# EAGLE board LSM9DS0_Breakout_Board-panel5 (EAGLE 7.1.0), part 1 of 2
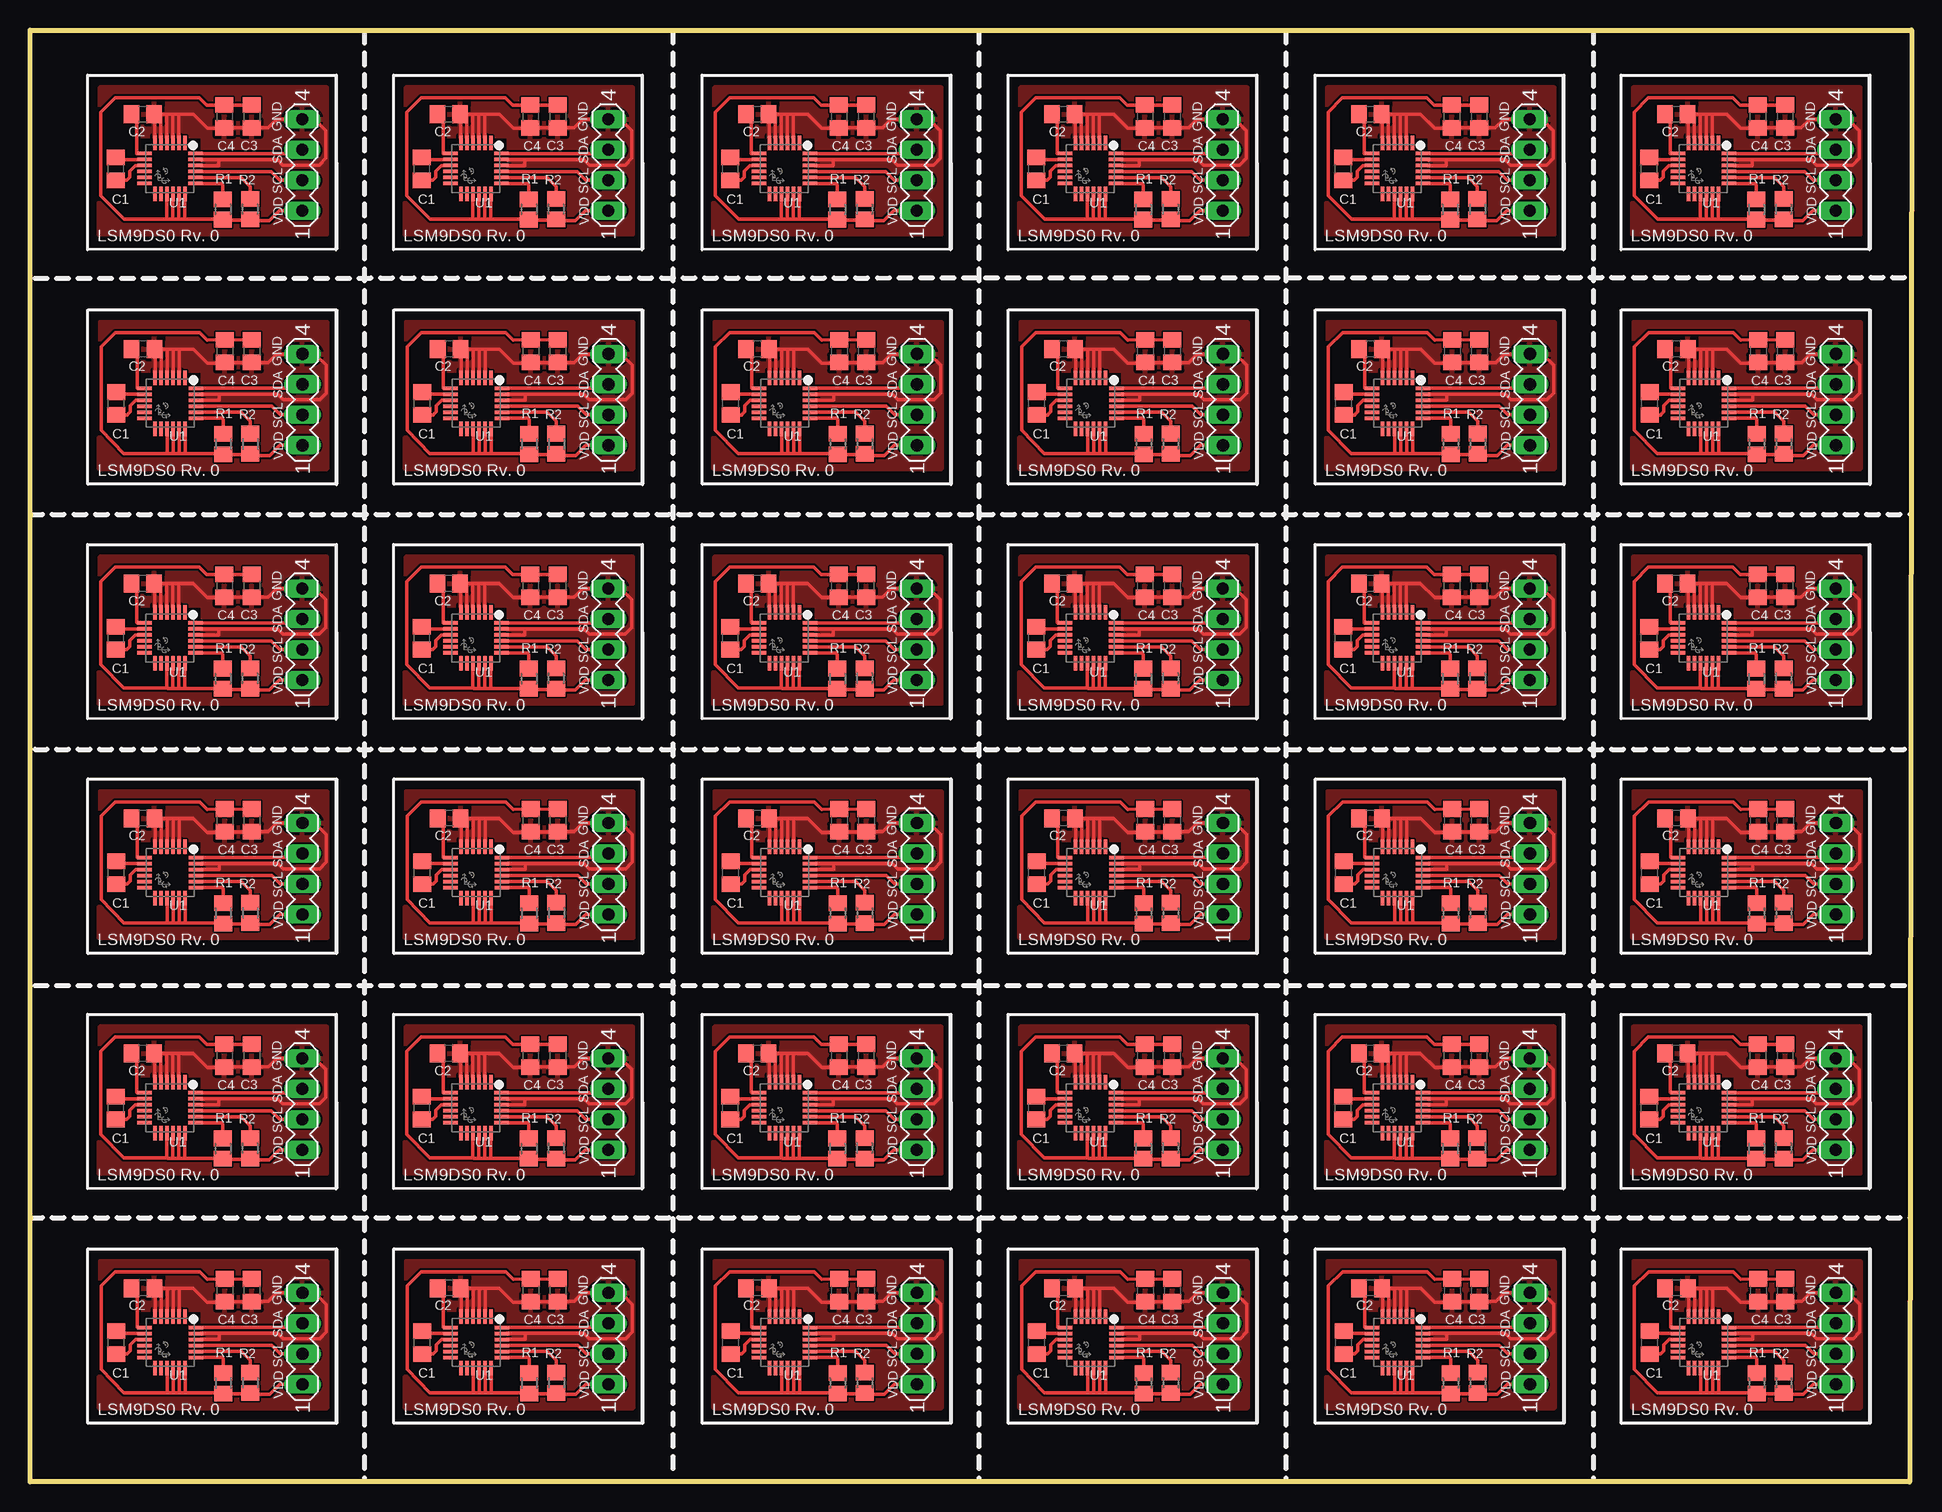
[diagram p0: board, top side]

Size 156.79 x 121.03 mm. Coordinates in mm from the lower left corner, seen from the top.
Outline: 0,121.03 156.79,121.03 156.64,0 0,0 0,121.03
Copper layers (1*16): Top 0.035559375mm / dielectric 1.501140625mm / Bottom 0.035559375mm
Design rules "4pcb-33board *": minimum track width 8mil, minimum drill 15mil, track to track 6mil, track to pad 6mil, pad to pad 6mil, via to via 6mil, smd to smd 6mil, copper to edge 10mil, drill to drill 10mil, minimum pad ring 10mil, minimum via ring 8mil, stop-mask expansion 4mil, vias tented up to drill 0mil, thermal gap 10mil
Net classes: 1 RFSIG: width 0.457 mm, clearance 0.205 mm to class 0, clearance 0.205 mm
bRestrict: area 10.2,10.1 to 13.2,13.1; area 10.2,29.6 to 13.1,32.7; area 10.2,49.2 to 13.2,52.3; area 10.2,68.8 to 13.1,71.9; area 10.2,88.3 to 13.2,91.4; area 10.2,107.9 to 13.1,111; area 35.7,10.1 to 38.7,13.1; area 35.7,29.6 to 38.6,32.7; area 35.7,49.2 to 38.7,52.3; area 35.7,68.8 to 38.6,71.9; area 35.7,88.3 to 38.7,91.4; area 35.7,107.9 to 38.6,111; 24 more areas

## Footprints (pad centres in the part's own frame; a part is rotated, then mirrored left to right if it is on the bottom)
C0805 = smd 1.3 x 1.5: 1 -0.95,0; 2 0.95,0
R0805 = smd 1.3 x 1.5: 1 -0.85,0; 2 0.85,0
MA04-1 = drill 1.016 long: 1 -3.81,0; 2 -1.27,0; 3 1.27,0; 4 3.81,0
LGA-24 = smd 1.208 x 0.29: 1 -2.129,1.25; 2 -2.129,0.75; 3 -2.129,0.25; 4 -2.129,-0.25; 5 -2.129,-0.75; 6 -2.129,-1.25; 13 2.129,-1.25; 14 2.129,-0.75; 15 2.129,-0.25; 16 2.129,0.25; 17 2.129,0.75; 18 2.129,1.25 | smd 0.29 x 1.208: 7 -1.25,-2.129; 8 -0.75,-2.129; 9 -0.25,-2.129; 10 0.25,-2.129; 11 0.75,-2.129; 12 1.25,-2.129; 19 1.25,2.129; 20 0.75,2.129; 21 0.25,2.129; 22 -0.25,2.129; 23 -0.75,2.129; 24 -1.25,2.129

## Placement (x,y rotation side)
C1  0.22uF  [C0805]  7.19,11.61 90 top
C2  4.7uF  [C0805]  9.42,16.15 180 top
C3  10uF  [C0805]  18.49,15.98 270 top
C4  100nF  [C0805]  16.23,15.98 270 top
C5  100nF  [C0805]  16.21,35.53 270 top
C6  10uF  [C0805]  18.47,35.53 270 top
C7  0.22uF  [C0805]  7.16,31.17 90 top
C8  4.7uF  [C0805]  9.4,35.71 180 top
C9  100nF  [C0805]  16.23,55.14 270 top
C10  10uF  [C0805]  18.49,55.14 270 top
C11  0.22uF  [C0805]  7.19,50.77 90 top
C12  4.7uF  [C0805]  9.42,55.32 180 top
C13  100nF  [C0805]  16.21,74.7 270 top
C14  10uF  [C0805]  18.47,74.7 270 top
C15  0.22uF  [C0805]  7.16,70.33 90 top
C16  4.7uF  [C0805]  9.4,74.88 180 top
C17  100nF  [C0805]  16.23,94.26 270 top
C18  10uF  [C0805]  18.49,94.26 270 top
C19  0.22uF  [C0805]  7.19,89.89 90 top
C20  4.7uF  [C0805]  9.42,94.44 180 top
C21  100nF  [C0805]  16.21,113.82 270 top
C22  10uF  [C0805]  18.47,113.82 270 top
C23  0.22uF  [C0805]  7.16,109.45 90 top
C24  4.7uF  [C0805]  9.4,114 180 top
C33  100nF  [C0805]  41.73,15.98 270 top
C34  10uF  [C0805]  43.99,15.98 270 top
C35  0.22uF  [C0805]  32.69,11.61 90 top
C36  4.7uF  [C0805]  34.92,16.15 180 top
C37  100nF  [C0805]  41.71,35.53 270 top
C38  10uF  [C0805]  43.97,35.53 270 top
C39  0.22uF  [C0805]  32.66,31.17 90 top
C40  4.7uF  [C0805]  34.9,35.71 180 top
C41  100nF  [C0805]  41.73,55.14 270 top
C42  10uF  [C0805]  43.99,55.14 270 top
C43  0.22uF  [C0805]  32.69,50.77 90 top
C44  4.7uF  [C0805]  34.92,55.32 180 top
C45  100nF  [C0805]  41.71,74.7 270 top
C46  10uF  [C0805]  43.97,74.7 270 top
C47  0.22uF  [C0805]  32.66,70.33 90 top
C48  4.7uF  [C0805]  34.9,74.88 180 top
C49  100nF  [C0805]  41.73,94.26 270 top
C50  10uF  [C0805]  43.99,94.26 270 top
C51  0.22uF  [C0805]  32.69,89.89 90 top
C52  4.7uF  [C0805]  34.92,94.44 180 top
C53  100nF  [C0805]  41.71,113.82 270 top
C54  10uF  [C0805]  43.97,113.82 270 top
C55  0.22uF  [C0805]  32.66,109.45 90 top
C56  4.7uF  [C0805]  34.9,114 180 top
C65  100nF  [C0805]  67.44,15.98 270 top
C66  10uF  [C0805]  69.7,15.98 270 top
C67  0.22uF  [C0805]  58.39,11.61 90 top
C68  4.7uF  [C0805]  60.63,16.15 180 top
C69  100nF  [C0805]  67.41,35.53 270 top
C70  10uF  [C0805]  69.67,35.53 270 top
C71  0.22uF  [C0805]  58.37,31.17 90 top
C72  4.7uF  [C0805]  60.6,35.71 180 top
C73  100nF  [C0805]  67.44,55.14 270 top
C74  10uF  [C0805]  69.7,55.14 270 top
C75  0.22uF  [C0805]  58.39,50.77 90 top
C76  4.7uF  [C0805]  60.63,55.32 180 top
C77  100nF  [C0805]  67.41,74.7 270 top
C78  10uF  [C0805]  69.67,74.7 270 top
C79  0.22uF  [C0805]  58.37,70.33 90 top
C80  4.7uF  [C0805]  60.6,74.88 180 top
C81  100nF  [C0805]  67.44,94.26 270 top
C82  10uF  [C0805]  69.7,94.26 270 top
C83  0.22uF  [C0805]  58.39,89.89 90 top
C84  4.7uF  [C0805]  60.63,94.44 180 top
C85  100nF  [C0805]  67.41,113.82 270 top
C86  10uF  [C0805]  69.67,113.82 270 top
C87  0.22uF  [C0805]  58.37,109.45 90 top
C88  4.7uF  [C0805]  60.6,114 180 top
C97  100nF  [C0805]  92.94,15.98 270 top
C98  10uF  [C0805]  95.2,15.98 270 top
C99  0.22uF  [C0805]  83.9,11.61 90 top
C100  4.7uF  [C0805]  86.13,16.15 180 top
C101  100nF  [C0805]  92.91,35.53 270 top
C102  10uF  [C0805]  95.17,35.53 270 top
C103  0.22uF  [C0805]  83.87,31.17 90 top
C104  4.7uF  [C0805]  86.11,35.71 180 top
C105  100nF  [C0805]  92.94,55.14 270 top
C106  10uF  [C0805]  95.2,55.14 270 top
C107  0.22uF  [C0805]  83.9,50.77 90 top
C108  4.7uF  [C0805]  86.13,55.32 180 top
C109  100nF  [C0805]  92.91,74.7 270 top
C110  10uF  [C0805]  95.17,74.7 270 top
C111  0.22uF  [C0805]  83.87,70.33 90 top
C112  4.7uF  [C0805]  86.11,74.88 180 top
C113  100nF  [C0805]  92.94,94.26 270 top
C114  10uF  [C0805]  95.2,94.26 270 top
C115  0.22uF  [C0805]  83.9,89.89 90 top
C116  4.7uF  [C0805]  86.13,94.44 180 top
C117  100nF  [C0805]  92.91,113.82 270 top
C118  10uF  [C0805]  95.17,113.82 270 top
C119  0.22uF  [C0805]  83.87,109.45 90 top
C120  4.7uF  [C0805]  86.11,114 180 top
C129  100nF  [C0805]  118.52,15.98 270 top
C130  10uF  [C0805]  120.78,15.98 270 top
C131  0.22uF  [C0805]  109.47,11.61 90 top
C132  4.7uF  [C0805]  111.71,16.15 180 top
C133  100nF  [C0805]  118.49,35.53 270 top
C134  10uF  [C0805]  120.75,35.53 270 top
C135  0.22uF  [C0805]  109.45,31.17 90 top
C136  4.7uF  [C0805]  111.68,35.71 180 top
C137  100nF  [C0805]  118.52,55.14 270 top
C138  10uF  [C0805]  120.78,55.14 270 top
C139  0.22uF  [C0805]  109.47,50.77 90 top
C140  4.7uF  [C0805]  111.71,55.32 180 top
C141  100nF  [C0805]  118.49,74.7 270 top
C142  10uF  [C0805]  120.75,74.7 270 top
C143  0.22uF  [C0805]  109.45,70.33 90 top
C144  4.7uF  [C0805]  111.68,74.88 180 top
C145  100nF  [C0805]  118.52,94.26 270 top
C146  10uF  [C0805]  120.78,94.26 270 top
C147  0.22uF  [C0805]  109.47,89.89 90 top
C148  4.7uF  [C0805]  111.71,94.44 180 top
C149  100nF  [C0805]  118.49,113.82 270 top
C150  10uF  [C0805]  120.75,113.82 270 top
C151  0.22uF  [C0805]  109.45,109.45 90 top
C152  4.7uF  [C0805]  111.68,114 180 top
C161  100nF  [C0805]  144.02,15.98 270 top
C162  10uF  [C0805]  146.28,15.98 270 top
C163  0.22uF  [C0805]  134.98,11.61 90 top
C164  4.7uF  [C0805]  137.21,16.15 180 top
C165  100nF  [C0805]  143.99,35.53 270 top
C166  10uF  [C0805]  146.25,35.53 270 top
C167  0.22uF  [C0805]  134.95,31.17 90 top
C168  4.7uF  [C0805]  137.19,35.71 180 top
C169  100nF  [C0805]  144.02,55.14 270 top
C170  10uF  [C0805]  146.28,55.14 270 top
C171  0.22uF  [C0805]  134.98,50.77 90 top
C172  4.7uF  [C0805]  137.21,55.32 180 top
C173  100nF  [C0805]  143.99,74.7 270 top
C174  10uF  [C0805]  146.25,74.7 270 top
C175  0.22uF  [C0805]  134.95,70.33 90 top
C176  4.7uF  [C0805]  137.19,74.88 180 top
C177  100nF  [C0805]  144.02,94.26 270 top
C178  10uF  [C0805]  146.28,94.26 270 top
C179  0.22uF  [C0805]  134.98,89.89 90 top
C180  4.7uF  [C0805]  137.21,94.44 180 top
C181  100nF  [C0805]  143.99,113.82 270 top
C182  10uF  [C0805]  146.25,113.82 270 top
C183  0.22uF  [C0805]  134.95,109.45 90 top
C184  4.7uF  [C0805]  137.19,114 180 top
R1  10k  [R0805]  16.1,8.23 270 top
R2  10k  [R0805]  18.36,8.25 270 top
R3  10k  [R0805]  16.08,27.79 270 top
R4  10k  [R0805]  18.34,27.81 270 top
R5  10k  [R0805]  16.1,47.4 270 top
R6  10k  [R0805]  18.36,47.42 270 top
R7  10k  [R0805]  16.08,66.95 270 top
R8  10k  [R0805]  18.34,66.98 270 top
R9  10k  [R0805]  16.1,86.51 270 top
R10  10k  [R0805]  18.36,86.54 270 top
R11  10k  [R0805]  16.08,106.07 270 top
R12  10k  [R0805]  18.34,106.1 270 top
R17  10k  [R0805]  41.61,8.23 270 top
R18  10k  [R0805]  43.87,8.25 270 top
R19  10k  [R0805]  41.58,27.79 270 top
R20  10k  [R0805]  43.84,27.81 270 top
R21  10k  [R0805]  41.61,47.4 270 top
R22  10k  [R0805]  43.87,47.42 270 top
R23  10k  [R0805]  41.58,66.95 270 top
R24  10k  [R0805]  43.84,66.98 270 top
R25  10k  [R0805]  41.61,86.51 270 top
R26  10k  [R0805]  43.87,86.54 270 top
R27  10k  [R0805]  41.58,106.07 270 top
R28  10k  [R0805]  43.84,106.1 270 top
R33  10k  [R0805]  67.31,8.23 270 top
R34  10k  [R0805]  69.57,8.25 270 top
R35  10k  [R0805]  67.28,27.79 270 top
R36  10k  [R0805]  69.55,27.81 270 top
R37  10k  [R0805]  67.31,47.4 270 top
R38  10k  [R0805]  69.57,47.42 270 top
R39  10k  [R0805]  67.28,66.95 270 top
R40  10k  [R0805]  69.55,66.98 270 top
R41  10k  [R0805]  67.31,86.51 270 top
R42  10k  [R0805]  69.57,86.54 270 top
R43  10k  [R0805]  67.28,106.07 270 top
R44  10k  [R0805]  69.55,106.1 270 top
R49  10k  [R0805]  92.81,8.23 270 top
R50  10k  [R0805]  95.07,8.25 270 top
R51  10k  [R0805]  92.79,27.79 270 top
R52  10k  [R0805]  95.05,27.81 270 top
R53  10k  [R0805]  92.81,47.4 270 top
R54  10k  [R0805]  95.07,47.42 270 top
R55  10k  [R0805]  92.79,66.95 270 top
R56  10k  [R0805]  95.05,66.98 270 top
R57  10k  [R0805]  92.81,86.51 270 top
R58  10k  [R0805]  95.07,86.54 270 top
R59  10k  [R0805]  92.79,106.07 270 top
R60  10k  [R0805]  95.05,106.1 270 top
R65  10k  [R0805]  118.39,8.23 270 top
R66  10k  [R0805]  120.65,8.25 270 top
R67  10k  [R0805]  118.36,27.79 270 top
R68  10k  [R0805]  120.62,27.81 270 top
R69  10k  [R0805]  118.39,47.4 270 top
R70  10k  [R0805]  120.65,47.42 270 top
R71  10k  [R0805]  118.36,66.95 270 top
R72  10k  [R0805]  120.62,66.98 270 top
R73  10k  [R0805]  118.39,86.51 270 top
R74  10k  [R0805]  120.65,86.54 270 top
R75  10k  [R0805]  118.36,106.07 270 top
R76  10k  [R0805]  120.62,106.1 270 top
R81  10k  [R0805]  143.89,8.23 270 top
R82  10k  [R0805]  146.15,8.25 270 top
R83  10k  [R0805]  143.87,27.79 270 top
R84  10k  [R0805]  146.13,27.81 270 top
R85  10k  [R0805]  143.89,47.4 270 top
R86  10k  [R0805]  146.15,47.42 270 top
R87  10k  [R0805]  143.87,66.95 270 top
R88  10k  [R0805]  146.13,66.98 270 top
R89  10k  [R0805]  143.89,86.51 270 top
R90  10k  [R0805]  146.15,86.54 270 top
R91  10k  [R0805]  143.87,106.07 270 top
R92  10k  [R0805]  146.13,106.1 270 top
SV1  JP1  [MA04-1]  22.71,11.94 90 top
SV2  JP1  [MA04-1]  22.68,31.5 90 top
SV3  JP1  [MA04-1]  22.71,51.1 90 top
SV4  JP1  [MA04-1]  22.68,70.66 90 top
SV5  JP1  [MA04-1]  22.71,90.22 90 top
SV6  JP1  [MA04-1]  22.68,109.78 90 top
SV9  JP1  [MA04-1]  48.21,11.94 90 top
SV10  JP1  [MA04-1]  48.18,31.5 90 top
SV11  JP1  [MA04-1]  48.21,51.1 90 top
SV12  JP1  [MA04-1]  48.18,70.66 90 top
SV13  JP1  [MA04-1]  48.21,90.22 90 top
SV14  JP1  [MA04-1]  48.18,109.78 90 top
SV17  JP1  [MA04-1]  73.91,11.94 90 top
SV18  JP1  [MA04-1]  73.89,31.5 90 top
SV19  JP1  [MA04-1]  73.91,51.1 90 top
SV20  JP1  [MA04-1]  73.89,70.66 90 top
SV21  JP1  [MA04-1]  73.91,90.22 90 top
SV22  JP1  [MA04-1]  73.89,109.78 90 top
SV25  JP1  [MA04-1]  99.42,11.94 90 top
SV26  JP1  [MA04-1]  99.39,31.5 90 top
SV27  JP1  [MA04-1]  99.42,51.1 90 top
SV28  JP1  [MA04-1]  99.39,70.66 90 top
SV29  JP1  [MA04-1]  99.42,90.22 90 top
SV30  JP1  [MA04-1]  99.39,109.78 90 top
SV33  JP1  [MA04-1]  124.99,11.94 90 top
SV34  JP1  [MA04-1]  124.97,31.5 90 top
SV35  JP1  [MA04-1]  124.99,51.1 90 top
SV36  JP1  [MA04-1]  124.97,70.66 90 top
SV37  JP1  [MA04-1]  124.99,90.22 90 top
SV38  JP1  [MA04-1]  124.97,109.78 90 top
SV41  JP1  [MA04-1]  150.5,11.94 90 top
SV42  JP1  [MA04-1]  150.47,31.5 90 top
SV43  JP1  [MA04-1]  150.5,51.1 90 top
SV44  JP1  [MA04-1]  150.47,70.66 90 top
SV45  JP1  [MA04-1]  150.5,90.22 90 top
SV46  JP1  [MA04-1]  150.47,109.78 90 top
U1  LSM9DS0  [LGA-24]  11.68,11.63 270 top
U2  LSM9DS0  [LGA-24]  11.66,31.19 270 top
U3  LSM9DS0  [LGA-24]  11.68,50.8 270 top
U4  LSM9DS0  [LGA-24]  11.66,70.36 270 top
U5  LSM9DS0  [LGA-24]  11.68,89.92 270 top
U6  LSM9DS0  [LGA-24]  11.66,109.47 270 top
U9  LSM9DS0  [LGA-24]  37.19,11.63 270 top
U10  LSM9DS0  [LGA-24]  37.16,31.19 270 top
U11  LSM9DS0  [LGA-24]  37.19,50.8 270 top
U12  LSM9DS0  [LGA-24]  37.16,70.36 270 top
U13  LSM9DS0  [LGA-24]  37.19,89.92 270 top
U14  LSM9DS0  [LGA-24]  37.16,109.47 270 top
U17  LSM9DS0  [LGA-24]  62.89,11.63 270 top
U18  LSM9DS0  [LGA-24]  62.87,31.19 270 top
U19  LSM9DS0  [LGA-24]  62.89,50.8 270 top
U20  LSM9DS0  [LGA-24]  62.87,70.36 270 top
U21  LSM9DS0  [LGA-24]  62.89,89.92 270 top
U22  LSM9DS0  [LGA-24]  62.87,109.47 270 top
U25  LSM9DS0  [LGA-24]  88.39,11.63 270 top
U26  LSM9DS0  [LGA-24]  88.37,31.19 270 top
U27  LSM9DS0  [LGA-24]  88.39,50.8 270 top
U28  LSM9DS0  [LGA-24]  88.37,70.36 270 top
U29  LSM9DS0  [LGA-24]  88.39,89.92 270 top
U30  LSM9DS0  [LGA-24]  88.37,109.47 270 top
U33  LSM9DS0  [LGA-24]  113.97,11.63 270 top
U34  LSM9DS0  [LGA-24]  113.94,31.19 270 top
U35  LSM9DS0  [LGA-24]  113.97,50.8 270 top
U36  LSM9DS0  [LGA-24]  113.94,70.36 270 top
U37  LSM9DS0  [LGA-24]  113.97,89.92 270 top
U38  LSM9DS0  [LGA-24]  113.94,109.47 270 top
U41  LSM9DS0  [LGA-24]  139.47,11.63 270 top
U42  LSM9DS0  [LGA-24]  139.45,31.19 270 top
U43  LSM9DS0  [LGA-24]  139.47,50.8 270 top
U44  LSM9DS0  [LGA-24]  139.45,70.36 270 top
U45  LSM9DS0  [LGA-24]  139.47,89.92 270 top
U46  LSM9DS0  [LGA-24]  139.45,109.47 270 top

## Library data of the parts
C1-C24 C33-C56 C65-C88 C97-C120 C129-C152 C161-C184 = rcl
R1-R12 R17-R28 R33-R44 R49-R60 R65-R76 R81-R92 = resistor
SV1-SV6 SV9-SV14 SV17-SV22 SV25-SV30 SV33-SV38 SV41-SV46 = con-lstb; OC_FARNELL: unknown; OC_NEWARK: unknown
U1-U6 U9-U14 U17-U22 U25-U30 U33-U38 U41-U46 = Controller

## Nets
GND: C2.1 C3.2 C4.2 SV1.4 U1.2 U1.3 U1.4 U1.5 U1.6 U1.22 U1.23
GND1: C5.2 C6.2 C8.1 SV2.4 U2.2 U2.3 U2.4 U2.5 U2.6 U2.22 U2.23
GND2: C9.2 C10.2 C12.1 SV3.4 U3.2 U3.3 U3.4 U3.5 U3.6 U3.22 U3.23
GND3: C13.2 C14.2 C16.1 SV4.4 U4.2 U4.3 U4.4 U4.5 U4.6 U4.22 U4.23
GND4: C17.2 C18.2 C20.1 SV5.4 U5.2 U5.3 U5.4 U5.5 U5.6 U5.22 U5.23
GND5: C21.2 C22.2 C24.1 SV6.4 U6.2 U6.3 U6.4 U6.5 U6.6 U6.22 U6.23
GND8: C33.2 C34.2 C36.1 SV9.4 U9.2 U9.3 U9.4 U9.5 U9.6 U9.22 U9.23
GND9: C37.2 C38.2 C40.1 SV10.4 U10.2 U10.3 U10.4 U10.5 U10.6 U10.22 U10.23
GND10: C41.2 C42.2 C44.1 SV11.4 U11.2 U11.3 U11.4 U11.5 U11.6 U11.22 U11.23
GND11: C45.2 C46.2 C48.1 SV12.4 U12.2 U12.3 U12.4 U12.5 U12.6 U12.22 U12.23
GND12: C49.2 C50.2 C52.1 SV13.4 U13.2 U13.3 U13.4 U13.5 U13.6 U13.22 U13.23
GND13: C53.2 C54.2 C56.1 SV14.4 U14.2 U14.3 U14.4 U14.5 U14.6 U14.22 U14.23
GND16: C65.2 C66.2 C68.1 SV17.4 U17.2 U17.3 U17.4 U17.5 U17.6 U17.22 U17.23
GND17: C69.2 C70.2 C72.1 SV18.4 U18.2 U18.3 U18.4 U18.5 U18.6 U18.22 U18.23
GND18: C73.2 C74.2 C76.1 SV19.4 U19.2 U19.3 U19.4 U19.5 U19.6 U19.22 U19.23
GND19: C77.2 C78.2 C80.1 SV20.4 U20.2 U20.3 U20.4 U20.5 U20.6 U20.22 U20.23
GND20: C81.2 C82.2 C84.1 SV21.4 U21.2 U21.3 U21.4 U21.5 U21.6 U21.22 U21.23
GND21: C85.2 C86.2 C88.1 SV22.4 U22.2 U22.3 U22.4 U22.5 U22.6 U22.22 U22.23
GND24: C97.2 C98.2 C100.1 SV25.4 U25.2 U25.3 U25.4 U25.5 U25.6 U25.22 U25.23
GND25: C101.2 C102.2 C104.1 SV26.4 U26.2 U26.3 U26.4 U26.5 U26.6 U26.22 U26.23
GND26: C105.2 C106.2 C108.1 SV27.4 U27.2 U27.3 U27.4 U27.5 U27.6 U27.22 U27.23
GND27: C109.2 C110.2 C112.1 SV28.4 U28.2 U28.3 U28.4 U28.5 U28.6 U28.22 U28.23
GND28: C113.2 C114.2 C116.1 SV29.4 U29.2 U29.3 U29.4 U29.5 U29.6 U29.22 U29.23
GND29: C117.2 C118.2 C120.1 SV30.4 U30.2 U30.3 U30.4 U30.5 U30.6 U30.22 U30.23
GND32: C129.2 C130.2 C132.1 SV33.4 U33.2 U33.3 U33.4 U33.5 U33.6 U33.22 U33.23
GND33: C133.2 C134.2 C136.1 SV34.4 U34.2 U34.3 U34.4 U34.5 U34.6 U34.22 U34.23
GND34: C137.2 C138.2 C140.1 SV35.4 U35.2 U35.3 U35.4 U35.5 U35.6 U35.22 U35.23
GND35: C141.2 C142.2 C144.1 SV36.4 U36.2 U36.3 U36.4 U36.5 U36.6 U36.22 U36.23
GND36: C145.2 C146.2 C148.1 SV37.4 U37.2 U37.3 U37.4 U37.5 U37.6 U37.22 U37.23
GND37: C149.2 C150.2 C152.1 SV38.4 U38.2 U38.3 U38.4 U38.5 U38.6 U38.22 U38.23
GND40: C161.2 C162.2 C164.1 SV41.4 U41.2 U41.3 U41.4 U41.5 U41.6 U41.22 U41.23
GND41: C165.2 C166.2 C168.1 SV42.4 U42.2 U42.3 U42.4 U42.5 U42.6 U42.22 U42.23
GND42: C169.2 C170.2 C172.1 SV43.4 U43.2 U43.3 U43.4 U43.5 U43.6 U43.22 U43.23
GND43: C173.2 C174.2 C176.1 SV44.4 U44.2 U44.3 U44.4 U44.5 U44.6 U44.22 U44.23
GND44: C177.2 C178.2 C180.1 SV45.4 U45.2 U45.3 U45.4 U45.5 U45.6 U45.22 U45.23
GND45: C181.2 C182.2 C184.1 SV46.4 U46.2 U46.3 U46.4 U46.5 U46.6 U46.22 U46.23
N$1: C8.2 U2.7
N$2: C7.2 U2.8
N$3: C7.1 U2.9
N$4: R3.1 U2.19
N$5: R4.1 U2.20
N$6: C12.2 U3.7
N$7: C11.2 U3.8
N$8: C11.1 U3.9
N$9: R5.1 U3.19
N$10: R6.1 U3.20
N$11: C16.2 U4.7
N$12: C15.2 U4.8
N$13: C15.1 U4.9
N$14: R7.1 U4.19
N$15: R8.1 U4.20
N$16: C20.2 U5.7
N$17: C19.2 U5.8
N$18: C19.1 U5.9
N$19: R9.1 U5.19
N$20: C2.2 U1.7
N$21: C1.2 U1.8
N$22: C1.1 U1.9
N$23: R1.1 U1.19
N$24: R2.1 U1.20
N$25: R10.1 U5.20
N$26: C24.2 U6.7
N$27: C23.2 U6.8
N$28: C23.1 U6.9
N$29: R11.1 U6.19
N$30: R12.1 U6.20
N$41: C36.2 U9.7
N$42: C35.2 U9.8
N$43: C35.1 U9.9
N$44: R17.1 U9.19
N$45: R18.1 U9.20
N$46: C40.2 U10.7
N$47: C39.2 U10.8
N$48: C39.1 U10.9
N$49: R19.1 U10.19
N$50: R20.1 U10.20
N$51: C44.2 U11.7
N$52: C43.2 U11.8
N$53: C43.1 U11.9
N$54: R21.1 U11.19
N$55: R22.1 U11.20
N$56: C48.2 U12.7
N$57: C47.2 U12.8
N$58: C47.1 U12.9
N$59: R23.1 U12.19
N$60: R24.1 U12.20
N$61: C52.2 U13.7
N$62: C51.2 U13.8
N$63: C51.1 U13.9
N$64: R25.1 U13.19
N$65: R26.1 U13.20
N$66: C56.2 U14.7
N$67: C55.2 U14.8
N$68: C55.1 U14.9
N$69: R27.1 U14.19
N$70: R28.1 U14.20
N$81: C68.2 U17.7
N$82: C67.2 U17.8
N$83: C67.1 U17.9
N$84: R33.1 U17.19
N$85: R34.1 U17.20
N$86: C72.2 U18.7
N$87: C71.2 U18.8
N$88: C71.1 U18.9
N$89: R35.1 U18.19
N$90: R36.1 U18.20
N$91: C76.2 U19.7
N$92: C75.2 U19.8
N$93: C75.1 U19.9
N$94: R37.1 U19.19
N$95: R38.1 U19.20
N$96: C80.2 U20.7
N$97: C79.2 U20.8
N$98: C79.1 U20.9
N$99: R39.1 U20.19
N$100: R40.1 U20.20
N$101: C84.2 U21.7
N$102: C83.2 U21.8
N$103: C83.1 U21.9
N$104: R41.1 U21.19
N$105: R42.1 U21.20
N$106: C88.2 U22.7
N$107: C87.2 U22.8
N$108: C87.1 U22.9
N$109: R43.1 U22.19
N$110: R44.1 U22.20
N$121: C100.2 U25.7
N$122: C99.2 U25.8
N$123: C99.1 U25.9
N$124: R49.1 U25.19
N$125: R50.1 U25.20
N$126: C104.2 U26.7
N$127: C103.2 U26.8
N$128: C103.1 U26.9
N$129: R51.1 U26.19
N$130: R52.1 U26.20
N$131: C108.2 U27.7
N$132: C107.2 U27.8
N$133: C107.1 U27.9
N$134: R53.1 U27.19
N$135: R54.1 U27.20
N$136: C112.2 U28.7
N$137: C111.2 U28.8
N$138: C111.1 U28.9
N$139: R55.1 U28.19
N$140: R56.1 U28.20
N$141: C116.2 U29.7
N$142: C115.2 U29.8
N$143: C115.1 U29.9
N$144: R57.1 U29.19
N$145: R58.1 U29.20
N$146: C120.2 U30.7
N$147: C119.2 U30.8
N$148: C119.1 U30.9
N$149: R59.1 U30.19
N$150: R60.1 U30.20
N$161: C132.2 U33.7
N$162: C131.2 U33.8
N$163: C131.1 U33.9
N$164: R65.1 U33.19
N$165: R66.1 U33.20
N$166: C136.2 U34.7
N$167: C135.2 U34.8
N$168: C135.1 U34.9
N$169: R67.1 U34.19
N$170: R68.1 U34.20
N$171: C140.2 U35.7
N$172: C139.2 U35.8
N$173: C139.1 U35.9
N$174: R69.1 U35.19
N$175: R70.1 U35.20
N$176: C144.2 U36.7
N$177: C143.2 U36.8
N$178: C143.1 U36.9
N$179: R71.1 U36.19
N$180: R72.1 U36.20
N$181: C148.2 U37.7
N$182: C147.2 U37.8
N$183: C147.1 U37.9
N$184: R73.1 U37.19
N$185: R74.1 U37.20
N$186: C152.2 U38.7
N$187: C151.2 U38.8
N$188: C151.1 U38.9
N$189: R75.1 U38.19
N$190: R76.1 U38.20
N$201: C164.2 U41.7
N$202: C163.2 U41.8
N$203: C163.1 U41.9
N$204: R81.1 U41.19
N$205: R82.1 U41.20
N$206: C168.2 U42.7
N$207: C167.2 U42.8
N$208: C167.1 U42.9
N$209: R83.1 U42.19
N$210: R84.1 U42.20
N$211: C172.2 U43.7
N$212: C171.2 U43.8
N$213: C171.1 U43.9
N$214: R85.1 U43.19
N$215: R86.1 U43.20
N$216: C176.2 U44.7
N$217: C175.2 U44.8
N$218: C175.1 U44.9
N$219: R87.1 U44.19
N$220: R88.1 U44.20
N$221: C180.2 U45.7
N$222: C179.2 U45.8
N$223: C179.1 U45.9
N$224: R89.1 U45.19
N$225: R90.1 U45.20
N$226: C184.2 U46.7
N$227: C183.2 U46.8
N$228: C183.1 U46.9
N$229: R91.1 U46.19
N$230: R92.1 U46.20
SCL: SV1.2 U1.21
SCL1: SV2.2 U2.21
SCL2: SV3.2 U3.21
SCL3: SV4.2 U4.21
SCL4: SV5.2 U5.21
SCL5: SV6.2 U6.21
SCL8: SV9.2 U9.21
SCL9: SV10.2 U10.21
SCL10: SV11.2 U11.21
SCL11: SV12.2 U12.21
SCL12: SV13.2 U13.21
SCL13: SV14.2 U14.21
SCL16: SV17.2 U17.21
SCL17: SV18.2 U18.21
SCL18: SV19.2 U19.21
SCL19: SV20.2 U20.21
SCL20: SV21.2 U21.21
SCL21: SV22.2 U22.21
SCL24: SV25.2 U25.21
SCL25: SV26.2 U26.21
SCL26: SV27.2 U27.21
SCL27: SV28.2 U28.21
SCL28: SV29.2 U29.21
SCL29: SV30.2 U30.21
SCL32: SV33.2 U33.21
SCL33: SV34.2 U34.21
SCL34: SV35.2 U35.21
SCL35: SV36.2 U36.21
SCL36: SV37.2 U37.21
SCL37: SV38.2 U38.21
SCL40: SV41.2 U41.21
SCL41: SV42.2 U42.21
SCL42: SV43.2 U43.21
SCL43: SV44.2 U44.21
SCL44: SV45.2 U45.21
SCL45: SV46.2 U46.21
SDA: SV1.3 U1.24
SDA1: SV2.3 U2.24
SDA2: SV3.3 U3.24
SDA3: SV4.3 U4.24
SDA4: SV5.3 U5.24
SDA5: SV6.3 U6.24
SDA8: SV9.3 U9.24
SDA9: SV10.3 U10.24
SDA10: SV11.3 U11.24
SDA11: SV12.3 U12.24
SDA12: SV13.3 U13.24
SDA13: SV14.3 U14.24
SDA16: SV17.3 U17.24
SDA17: SV18.3 U18.24
SDA18: SV19.3 U19.24
SDA19: SV20.3 U20.24
SDA20: SV21.3 U21.24
SDA21: SV22.3 U22.24
SDA24: SV25.3 U25.24
SDA25: SV26.3 U26.24
SDA26: SV27.3 U27.24
SDA27: SV28.3 U28.24
SDA28: SV29.3 U29.24
SDA29: SV30.3 U30.24
SDA32: SV33.3 U33.24
SDA33: SV34.3 U34.24
SDA34: SV35.3 U35.24
SDA35: SV36.3 U36.24
SDA36: SV37.3 U37.24
SDA37: SV38.3 U38.24
SDA40: SV41.3 U41.24
SDA41: SV42.3 U42.24
SDA42: SV43.3 U43.24
SDA43: SV44.3 U44.24
SDA44: SV45.3 U45.24
SDA45: SV46.3 U46.24
VDD: C3.1 C4.1 R1.2 R2.2 SV1.1 U1.15 U1.16 U1.17 U1.18
VDD1: C5.1 C6.1 R3.2 R4.2 SV2.1 U2.15 U2.16 U2.17 U2.18
VDD2: C9.1 C10.1 R5.2 R6.2 SV3.1 U3.15 U3.16 U3.17 U3.18
VDD3: C13.1 C14.1 R7.2 R8.2 SV4.1 U4.15 U4.16 U4.17 U4.18
VDD4: C17.1 C18.1 R9.2 R10.2 SV5.1 U5.15 U5.16 U5.17 U5.18
VDD5: C21.1 C22.1 R11.2 R12.2 SV6.1 U6.15 U6.16 U6.17 U6.18
VDD8: C33.1 C34.1 R17.2 R18.2 SV9.1 U9.15 U9.16 U9.17 U9.18
VDD9: C37.1 C38.1 R19.2 R20.2 SV10.1 U10.15 U10.16 U10.17 U10.18
VDD10: C41.1 C42.1 R21.2 R22.2 SV11.1 U11.15 U11.16 U11.17 U11.18
VDD11: C45.1 C46.1 R23.2 R24.2 SV12.1 U12.15 U12.16 U12.17 U12.18
VDD12: C49.1 C50.1 R25.2 R26.2 SV13.1 U13.15 U13.16 U13.17 U13.18
VDD13: C53.1 C54.1 R27.2 R28.2 SV14.1 U14.15 U14.16 U14.17 U14.18
VDD16: C65.1 C66.1 R33.2 R34.2 SV17.1 U17.15 U17.16 U17.17 U17.18
VDD17: C69.1 C70.1 R35.2 R36.2 SV18.1 U18.15 U18.16 U18.17 U18.18
VDD18: C73.1 C74.1 R37.2 R38.2 SV19.1 U19.15 U19.16 U19.17 U19.18
VDD19: C77.1 C78.1 R39.2 R40.2 SV20.1 U20.15 U20.16 U20.17 U20.18
VDD20: C81.1 C82.1 R41.2 R42.2 SV21.1 U21.15 U21.16 U21.17 U21.18
VDD21: C85.1 C86.1 R43.2 R44.2 SV22.1 U22.15 U22.16 U22.17 U22.18
VDD24: C97.1 C98.1 R49.2 R50.2 SV25.1 U25.15 U25.16 U25.17 U25.18
VDD25: C101.1 C102.1 R51.2 R52.2 SV26.1 U26.15 U26.16 U26.17 U26.18
VDD26: C105.1 C106.1 R53.2 R54.2 SV27.1 U27.15 U27.16 U27.17 U27.18
VDD27: C109.1 C110.1 R55.2 R56.2 SV28.1 U28.15 U28.16 U28.17 U28.18
VDD28: C113.1 C114.1 R57.2 R58.2 SV29.1 U29.15 U29.16 U29.17 U29.18
VDD29: C117.1 C118.1 R59.2 R60.2 SV30.1 U30.15 U30.16 U30.17 U30.18
VDD32: C129.1 C130.1 R65.2 R66.2 SV33.1 U33.15 U33.16 U33.17 U33.18
VDD33: C133.1 C134.1 R67.2 R68.2 SV34.1 U34.15 U34.16 U34.17 U34.18
VDD34: C137.1 C138.1 R69.2 R70.2 SV35.1 U35.15 U35.16 U35.17 U35.18
VDD35: C141.1 C142.1 R71.2 R72.2 SV36.1 U36.15 U36.16 U36.17 U36.18
VDD36: C145.1 C146.1 R73.2 R74.2 SV37.1 U37.15 U37.16 U37.17 U37.18
VDD37: C149.1 C150.1 R75.2 R76.2 SV38.1 U38.15 U38.16 U38.17 U38.18
VDD40: C161.1 C162.1 R81.2 R82.2 SV41.1 U41.15 U41.16 U41.17 U41.18
VDD41: C165.1 C166.1 R83.2 R84.2 SV42.1 U42.15 U42.16 U42.17 U42.18
VDD42: C169.1 C170.1 R85.2 R86.2 SV43.1 U43.15 U43.16 U43.17 U43.18
VDD43: C173.1 C174.1 R87.2 R88.2 SV44.1 U44.15 U44.16 U44.17 U44.18
VDD44: C177.1 C178.1 R89.2 R90.2 SV45.1 U45.15 U45.16 U45.17 U45.18
VDD45: C181.1 C182.1 R91.2 R92.2 SV46.1 U46.15 U46.16 U46.17 U46.18

## Tracks (layer width: path | path; a pad name or v marks a point on that pad's centre or on a via)
GND
  Top 0.305: U1.6 10.43,16.09 C2.1 10.93,16.15 | 10.93,16.15 11.43,16.15 | 11.43,16.15 11.93,16.15 | 11.93,16.15 12.43,16.15 | 12.43,16.15 13.61,16.15 14.78,14.99 16.22,14.99 C4.2 C3.2 19.86,15.04 20.57,15.75 SV1.4 23.75,15.75 24.69,14.81 24.69,12.5 24.13,11.94 21.11,11.94 20.66,12.38 15.77,12.38 | U1.4 11.43,16.15 | U1.3 11.93,16.15 | U1.5 10.93,16.15 | U1.2 12.43,16.15 | U1.23 15.77,12.38 | U1.22 13.97,11.89 15.77,11.89 15.77,12.38
  pour Top: 5.74,6.2 24.77,6.2 24.77,18.36 5.84,18.36 5.84,14.38 14.4,14.38 14.4,8.74 5.74,8.74
GND1
  Top 0.305: U2.6 10.41,35.65 C8.1 10.91,35.71 | 10.91,35.71 11.41,35.71 | 11.41,35.71 11.91,35.71 | 11.91,35.71 12.41,35.71 | 12.41,35.71 13.59,35.71 14.76,34.54 16.19,34.54 C5.2 C6.2 18.48,34.59 19.84,34.59 20.55,35.31 SV2.4 23.72,35.31 24.66,34.37 24.66,32.05 24.1,31.5 21.08,31.5 20.64,31.94 15.75,31.94 | U2.4 11.41,35.71 | U2.3 11.91,35.71 | U2.5 10.91,35.71 | U2.2 12.41,35.71 | U2.23 15.75,31.94 | U2.22 13.94,31.45 15.75,31.45 15.75,31.94
  pour Top: 5.71,25.76 24.74,25.76 24.74,37.92 5.82,37.92 5.82,33.93 14.38,33.93 14.38,28.3 5.71,28.3
GND2
  Top 0.305: U3.6 10.43,55.26 C12.1 10.93,55.32 | 10.93,55.32 11.43,55.32 | 11.43,55.32 11.93,55.32 | 11.93,55.32 12.43,55.32 | 12.43,55.32 13.61,55.32 14.78,54.15 16.22,54.15 C9.2 C10.2 18.5,54.2 19.86,54.2 20.57,54.91 SV3.4 23.75,54.91 24.69,53.98 24.69,51.66 24.13,51.1 21.11,51.1 20.66,51.55 15.77,51.55 | U3.4 11.43,55.32 | U3.3 11.93,55.32 | U3.5 10.93,55.32 | U3.2 12.43,55.32 | U3.23 15.77,51.55 | U3.22 13.97,51.05 15.77,51.05 15.77,51.55
  pour Top: 5.74,45.36 24.77,45.36 24.77,57.53 5.84,57.53 5.84,53.54 14.4,53.54 14.4,47.9 5.74,47.9
GND3
  Top 0.305: U4.6 10.41,74.82 C16.1 10.91,74.88 | 10.91,74.88 11.41,74.88 | 11.41,74.88 11.91,74.88 | 11.91,74.88 12.41,74.88 | 12.41,74.88 13.59,74.88 14.76,73.71 16.19,73.71 C13.2 C14.2 19.84,73.76 20.55,74.47 SV4.4 23.72,74.47 24.66,73.53 24.66,71.22 24.1,70.66 21.08,70.66 20.64,71.11 15.75,71.11 | U4.4 11.41,74.88 | U4.3 11.91,74.88 | U4.5 10.91,74.88 | U4.2 12.41,74.88 | U4.23 15.75,71.11 | U4.22 13.94,70.61 15.75,70.61 15.75,71.11
  pour Top: 5.71,64.92 24.74,64.92 24.74,77.09 5.82,77.09 5.82,73.1 14.38,73.1 14.38,67.46 5.71,67.46
GND4
  Top 0.305: U5.6 10.43,94.38 C20.1 10.93,94.44 | 10.93,94.44 11.43,94.44 | 11.43,94.44 11.93,94.44 | 11.93,94.44 12.43,94.44 | 12.43,94.44 13.61,94.44 14.78,93.27 16.22,93.27 C17.2 C18.2 19.86,93.32 20.57,94.03 SV5.4 23.75,94.03 24.69,93.09 24.69,90.78 24.13,90.22 21.11,90.22 20.66,90.67 15.77,90.67 | U5.4 11.43,94.44 | U5.3 11.93,94.44 | U5.5 10.93,94.44 | U5.2 12.43,94.44 | U5.23 15.77,90.67 | U5.22 13.97,90.17 15.77,90.17 15.77,90.67
  pour Top: 5.74,84.48 24.77,84.48 24.77,96.65 5.84,96.65 5.84,92.66 14.4,92.66 14.4,87.02 5.74,87.02
GND5
  Top 0.305: U6.6 10.41,113.93 C24.1 10.91,114 | 10.91,114 11.41,114 | 11.41,114 11.91,114 | 11.91,114 12.41,114 | 12.41,114 13.59,114 14.76,112.83 16.19,112.83 C21.2 C22.2 19.84,112.88 20.55,113.59 SV6.4 23.72,113.59 24.66,112.65 24.66,110.34 24.1,109.78 21.08,109.78 20.64,110.22 15.75,110.22 | U6.4 11.41,114 | U6.3 11.91,114 | U6.5 10.91,114 | U6.2 12.41,114 | U6.23 15.75,110.22 | U6.22 13.94,109.73 15.75,109.73 15.75,110.22
  pour Top: 5.71,104.04 24.74,104.04 24.74,116.2 5.82,116.2 5.82,112.22 14.38,112.22 14.38,106.58 5.71,106.58
GND8
  Top 0.305: U9.6 35.94,16.09 C36.1 36.44,16.15 | 36.44,16.15 36.94,16.15 | 36.94,16.15 37.44,16.15 | 37.44,16.15 37.94,16.15 | 37.94,16.15 39.12,16.15 40.28,14.99 41.72,14.99 C33.2 C34.2 45.36,15.04 46.08,15.75 SV9.4 49.25,15.75 50.19,14.81 50.19,12.5 49.63,11.94 46.61,11.94 46.16,12.38 41.28,12.38 | U9.4 36.94,16.15 | U9.3 37.44,16.15 | U9.5 36.44,16.15 | U9.2 37.94,16.15 | U9.23 41.28,12.38 | U9.22 39.47,11.89 41.28,11.89 41.28,12.38
  pour Top: 31.24,6.2 50.27,6.2 50.27,18.36 31.34,18.36 31.34,14.38 39.9,14.38 39.9,8.74 31.24,8.74
GND9
  Top 0.305: U10.6 35.91,35.65 C40.1 36.41,35.71 | 36.41,35.71 36.91,35.71 | 36.91,35.71 37.41,35.71 | 37.41,35.71 37.91,35.71 | 37.91,35.71 39.09,35.71 40.26,34.54 41.69,34.54 C37.2 C38.2 43.98,34.59 45.34,34.59 46.05,35.31 SV10.4 49.23,35.31 50.17,34.37 50.17,32.05 49.61,31.5 46.58,31.5 46.14,31.94 41.25,31.94 | U10.4 36.91,35.71 | U10.3 37.41,35.71 | U10.5 36.41,35.71 | U10.2 37.91,35.71 | U10.23 41.25,31.94 | U10.22 39.44,31.45 41.25,31.45 41.25,31.94
  pour Top: 31.22,25.76 50.24,25.76 50.24,37.92 31.32,37.92 31.32,33.93 39.88,33.93 39.88,28.3 31.22,28.3
GND10
  Top 0.305: U11.6 35.94,55.26 C44.1 36.44,55.32 | 36.44,55.32 36.94,55.32 | 36.94,55.32 37.44,55.32 | 37.44,55.32 37.94,55.32 | 37.94,55.32 39.12,55.32 40.28,54.15 41.72,54.15 C41.2 C42.2 44,54.2 45.36,54.2 46.08,54.91 SV11.4 49.25,54.91 50.19,53.98 50.19,51.66 49.63,51.1 46.61,51.1 46.16,51.55 41.28,51.55 | U11.4 36.94,55.32 | U11.3 37.44,55.32 | U11.5 36.44,55.32 | U11.2 37.94,55.32 | U11.23 41.28,51.55 | U11.22 39.47,51.05 41.28,51.05 41.28,51.55
  pour Top: 31.24,45.36 50.27,45.36 50.27,57.53 31.34,57.53 31.34,53.54 39.9,53.54 39.9,47.9 31.24,47.9
GND11
  Top 0.305: U12.6 35.91,74.82 C48.1 36.41,74.88 | 36.41,74.88 36.91,74.88 | 36.91,74.88 37.41,74.88 | 37.41,74.88 37.91,74.88 | 37.91,74.88 39.09,74.88 40.26,73.71 41.69,73.71 C45.2 C46.2 43.98,73.76 45.34,73.76 46.05,74.47 SV12.4 49.23,74.47 50.17,73.53 50.17,71.22 49.61,70.66 46.58,70.66 46.14,71.11 41.25,71.11 | U12.4 36.91,74.88 | U12.3 37.41,74.88 | U12.5 36.41,74.88 | U12.2 37.91,74.88 | U12.23 41.25,71.11 | U12.22 39.44,70.61 41.25,70.61 41.25,71.11
  pour Top: 31.22,64.92 50.24,64.92 50.24,77.09 31.32,77.09 31.32,73.1 39.88,73.1 39.88,67.46 31.22,67.46
GND12
  Top 0.305: U13.6 35.94,94.38 C52.1 36.44,94.44 | 36.44,94.44 36.94,94.44 | 36.94,94.44 37.44,94.44 | 37.44,94.44 37.94,94.44 | 37.94,94.44 39.12,94.44 40.28,93.27 41.72,93.27 C49.2 C50.2 45.36,93.32 46.08,94.03 SV13.4 49.25,94.03 50.19,93.09 50.19,90.78 49.63,90.22 46.61,90.22 46.16,90.67 41.28,90.67 | U13.4 36.94,94.44 | U13.3 37.44,94.44 | U13.5 36.44,94.44 | U13.2 37.94,94.44 | U13.23 41.28,90.67 | U13.22 39.47,90.17 41.28,90.17 41.28,90.67
  pour Top: 31.24,84.48 50.27,84.48 50.27,96.65 31.34,96.65 31.34,92.66 39.9,92.66 39.9,87.02 31.24,87.02
GND13
  Top 0.305: U14.6 35.91,113.93 C56.1 36.41,114 | 36.41,114 36.91,114 | 36.91,114 37.41,114 | 37.41,114 37.91,114 | 37.91,114 39.09,114 40.26,112.83 41.69,112.83 C53.2 C54.2 43.98,112.88 45.34,112.88 46.05,113.59 SV14.4 49.23,113.59 50.17,112.65 50.17,110.34 49.61,109.78 46.58,109.78 46.14,110.22 41.25,110.22 | U14.4 36.91,114 | U14.3 37.41,114 | U14.5 36.41,114 | U14.2 37.91,114 | U14.23 41.25,110.22 | U14.22 39.44,109.73 41.25,109.73 41.25,110.22
  pour Top: 31.22,104.04 50.24,104.04 50.24,116.2 31.32,116.2 31.32,112.22 39.88,112.22 39.88,106.58 31.22,106.58
GND16
  Top 0.305: U17.6 61.64,16.09 C68.1 62.14,16.15 | 62.14,16.15 62.64,16.15 | 62.64,16.15 63.14,16.15 | 63.14,16.15 63.64,16.15 | 63.64,16.15 64.82,16.15 65.99,14.99 67.42,14.99 C65.2 C66.2 69.71,15.04 71.07,15.04 71.78,15.75 SV17.4 74.96,15.75 75.9,14.81 75.9,12.5 75.34,11.94 72.31,11.94 71.87,12.38 66.98,12.38 | U17.4 62.64,16.15 | U17.3 63.14,16.15 | U17.5 62.14,16.15 | U17.2 63.64,16.15 | U17.23 66.98,12.38 | U17.22 65.17,11.89 66.98,11.89 66.98,12.38
  pour Top: 56.95,6.2 75.97,6.2 75.97,18.36 57.05,18.36 57.05,14.38 65.61,14.38 65.61,8.74 56.95,8.74
GND17
  Top 0.305: U18.6 61.62,35.65 C72.1 62.12,35.71 | 62.12,35.71 62.62,35.71 | 62.62,35.71 63.12,35.71 | 63.12,35.71 63.62,35.71 | 63.62,35.71 64.8,35.71 65.96,34.54 67.4,34.54 C69.2 C70.2 69.68,34.59 71.04,34.59 71.76,35.31 SV18.4 74.93,35.31 75.87,34.37 75.87,32.05 75.31,31.5 72.29,31.5 71.84,31.94 66.95,31.94 | U18.4 62.62,35.71 | U18.3 63.12,35.71 | U18.5 62.12,35.71 | U18.2 63.62,35.71 | U18.23 66.95,31.94 | U18.22 65.15,31.45 66.95,31.45 66.95,31.94
  pour Top: 56.92,25.76 75.95,25.76 75.95,37.92 57.02,37.92 57.02,33.93 65.58,33.93 65.58,28.3 56.92,28.3
GND18
  Top 0.305: U19.6 61.64,55.26 C76.1 62.14,55.32 | 62.14,55.32 62.64,55.32 | 62.64,55.32 63.14,55.32 | 63.14,55.32 63.64,55.32 | 63.64,55.32 64.82,55.32 65.99,54.15 67.42,54.15 C73.2 C74.2 69.71,54.2 71.07,54.2 71.78,54.91 SV19.4 74.96,54.91 75.9,53.98 75.9,51.66 75.34,51.1 72.31,51.1 71.87,51.55 66.98,51.55 | U19.4 62.64,55.32 | U19.3 63.14,55.32 | U19.5 62.14,55.32 | U19.2 63.64,55.32 | U19.23 66.98,51.55 | U19.22 65.17,51.05 66.98,51.05 66.98,51.55
  pour Top: 56.95,45.36 75.97,45.36 75.97,57.53 57.05,57.53 57.05,53.54 65.61,53.54 65.61,47.9 56.95,47.9
GND19
  Top 0.305: U20.6 61.62,74.82 C80.1 62.12,74.88 | 62.12,74.88 62.62,74.88 | 62.62,74.88 63.12,74.88 | 63.12,74.88 63.62,74.88 | 63.62,74.88 64.8,74.88 65.96,73.71 67.4,73.71 C77.2 C78.2 71.04,73.76 71.76,74.47 SV20.4 74.93,74.47 75.87,73.53 75.87,71.22 75.31,70.66 72.29,70.66 71.84,71.11 66.95,71.11 | U20.4 62.62,74.88 | U20.3 63.12,74.88 | U20.5 62.12,74.88 | U20.2 63.62,74.88 | U20.23 66.95,71.11 | U20.22 65.15,70.61 66.95,70.61 66.95,71.11
  pour Top: 56.92,64.92 75.95,64.92 75.95,77.09 57.02,77.09 57.02,73.1 65.58,73.1 65.58,67.46 56.92,67.46
GND20
  Top 0.305: U21.6 61.64,94.38 C84.1 62.14,94.44 | 62.14,94.44 62.64,94.44 | 62.64,94.44 63.14,94.44 | 63.14,94.44 63.64,94.44 | 63.64,94.44 64.82,94.44 65.99,93.27 67.42,93.27 C81.2 C82.2 69.71,93.32 71.07,93.32 71.78,94.03 SV21.4 74.96,94.03 75.9,93.09 75.9,90.78 75.34,90.22 72.31,90.22 71.87,90.67 66.98,90.67 | U21.4 62.64,94.44 | U21.3 63.14,94.44 | U21.5 62.14,94.44 | U21.2 63.64,94.44 | U21.23 66.98,90.67 | U21.22 65.17,90.17 66.98,90.17 66.98,90.67
  pour Top: 56.95,84.48 75.97,84.48 75.97,96.65 57.05,96.65 57.05,92.66 65.61,92.66 65.61,87.02 56.95,87.02
GND21
  Top 0.305: U22.6 61.62,113.93 C88.1 62.12,114 | 62.12,114 62.62,114 | 62.62,114 63.12,114 | 63.12,114 63.62,114 | 63.62,114 64.8,114 65.96,112.83 67.4,112.83 C85.2 C86.2 71.04,112.88 71.76,113.59 SV22.4 74.93,113.59 75.87,112.65 75.87,110.34 75.31,109.78 72.29,109.78 71.84,110.22 66.95,110.22 | U22.4 62.62,114 | U22.3 63.12,114 | U22.5 62.12,114 | U22.2 63.62,114 | U22.23 66.95,110.22 | U22.22 65.15,109.73 66.95,109.73 66.95,110.22
  pour Top: 56.92,104.04 75.95,104.04 75.95,116.2 57.02,116.2 57.02,112.22 65.58,112.22 65.58,106.58 56.92,106.58
GND24
  Top 0.305: U25.6 87.14,16.09 C100.1 87.64,16.15 | 87.64,16.15 88.14,16.15 | 88.14,16.15 88.64,16.15 | 88.64,16.15 89.14,16.15 | 89.14,16.15 90.32,16.15 91.49,14.99 92.92,14.99 C97.2 C98.2 95.21,15.04 96.57,15.04 97.28,15.75 SV25.4 100.46,15.75 101.4,14.81 101.4,12.5 100.84,11.94 97.82,11.94 97.37,12.38 92.48,12.38 | U25.4 88.14,16.15 | U25.3 88.64,16.15 | U25.5 87.64,16.15 | U25.2 89.14,16.15 | U25.23 92.48,12.38 | U25.22 90.67,11.89 92.48,11.89 92.48,12.38
  pour Top: 82.45,6.2 101.47,6.2 101.47,18.36 82.55,18.36 82.55,14.38 91.11,14.38 91.11,8.74 82.45,8.74
GND25
  Top 0.305: U26.6 87.12,35.65 C104.1 87.62,35.71 | 87.62,35.71 88.12,35.71 | 88.12,35.71 88.62,35.71 | 88.62,35.71 89.12,35.71 | 89.12,35.71 90.3,35.71 91.47,34.54 92.9,34.54 C101.2 C102.2 95.18,34.59 96.55,34.59 97.26,35.31 SV26.4 100.43,35.31 101.37,34.37 101.37,32.05 100.81,31.5 97.79,31.5 97.35,31.94 92.46,31.94 | U26.4 88.12,35.71 | U26.3 88.62,35.71 | U26.5 87.62,35.71 | U26.2 89.12,35.71 | U26.23 92.46,31.94 | U26.22 90.65,31.45 92.46,31.45 92.46,31.94
  pour Top: 82.42,25.76 101.45,25.76 101.45,37.92 82.52,37.92 82.52,33.93 91.08,33.93 91.08,28.3 82.42,28.3
GND26
  Top 0.305: U27.6 87.14,55.26 C108.1 87.64,55.32 | 87.64,55.32 88.14,55.32 | 88.14,55.32 88.64,55.32 | 88.64,55.32 89.14,55.32 | 89.14,55.32 90.32,55.32 91.49,54.15 92.92,54.15 C105.2 C106.2 95.21,54.2 96.57,54.2 97.28,54.91 SV27.4 100.46,54.91 101.4,53.98 101.4,51.66 100.84,51.1 97.82,51.1 97.37,51.55 92.48,51.55 | U27.4 88.14,55.32 | U27.3 88.64,55.32 | U27.5 87.64,55.32 | U27.2 89.14,55.32 | U27.23 92.48,51.55 | U27.22 90.67,51.05 92.48,51.05 92.48,51.55
  pour Top: 82.45,45.36 101.47,45.36 101.47,57.53 82.55,57.53 82.55,53.54 91.11,53.54 91.11,47.9 82.45,47.9
GND27
  Top 0.305: U28.6 87.12,74.82 C112.1 87.62,74.88 | 87.62,74.88 88.12,74.88 | 88.12,74.88 88.62,74.88 | 88.62,74.88 89.12,74.88 | 89.12,74.88 90.3,74.88 91.47,73.71 92.9,73.71 C109.2 C110.2 96.55,73.76 97.26,74.47 SV28.4 100.43,74.47 101.37,73.53 101.37,71.22 100.81,70.66 97.79,70.66 97.35,71.11 92.46,71.11 | U28.4 88.12,74.88 | U28.3 88.62,74.88 | U28.5 87.62,74.88 | U28.2 89.12,74.88 | U28.23 92.46,71.11 | U28.22 90.65,70.61 92.46,70.61 92.46,71.11
  pour Top: 82.42,64.92 101.45,64.92 101.45,77.09 82.52,77.09 82.52,73.1 91.08,73.1 91.08,67.46 82.42,67.46
GND28
  Top 0.305: U29.6 87.14,94.38 C116.1 87.64,94.44 | 87.64,94.44 88.14,94.44 | 88.14,94.44 88.64,94.44 | 88.64,94.44 89.14,94.44 | 89.14,94.44 90.32,94.44 91.49,93.27 92.92,93.27 C113.2 C114.2 95.21,93.32 96.57,93.32 97.28,94.03 SV29.4 100.46,94.03 101.4,93.09 101.4,90.78 100.84,90.22 97.82,90.22 97.37,90.67 92.48,90.67 | U29.4 88.14,94.44 | U29.3 88.64,94.44 | U29.5 87.64,94.44 | U29.2 89.14,94.44 | U29.23 92.48,90.67 | U29.22 90.67,90.17 92.48,90.17 92.48,90.67
  pour Top: 82.45,84.48 101.47,84.48 101.47,96.65 82.55,96.65 82.55,92.66 91.11,92.66 91.11,87.02 82.45,87.02
GND29
  Top 0.305: U30.6 87.12,113.93 C120.1 87.62,114 | 87.62,114 88.12,114 | 88.12,114 88.62,114 | 88.62,114 89.12,114 | 89.12,114 90.3,114 91.47,112.83 92.9,112.83 C117.2 C118.2 96.55,112.88 97.26,113.59 SV30.4 100.43,113.59 101.37,112.65 101.37,110.34 100.81,109.78 97.79,109.78 97.35,110.22 92.46,110.22 | U30.4 88.12,114 | U30.3 88.62,114 | U30.5 87.62,114 | U30.2 89.12,114 | U30.23 92.46,110.22 | U30.22 90.65,109.73 92.46,109.73 92.46,110.22
  pour Top: 82.42,104.04 101.45,104.04 101.45,116.2 82.52,116.2 82.52,112.22 91.08,112.22 91.08,106.58 82.42,106.58
GND32
  Top 0.305: U33.6 112.72,16.09 C132.1 113.22,16.15 | 113.22,16.15 113.72,16.15 | 113.72,16.15 114.22,16.15 | 114.22,16.15 114.72,16.15 | 114.72,16.15 115.9,16.15 117.07,14.99 118.5,14.99 C129.2 C130.2 120.79,15.04 122.15,15.04 122.86,15.75 SV33.4 126.04,15.75 126.97,14.81 126.97,12.5 126.42,11.94 123.39,11.94 122.95,12.38 118.06,12.38 | U33.4 113.72,16.15 | U33.3 114.22,16.15 | U33.5 113.22,16.15 | U33.2 114.72,16.15 | U33.23 118.06,12.38 | U33.22 116.25,11.89 118.06,11.89 118.06,12.38
  pour Top: 108.03,6.2 127.05,6.2 127.05,18.36 108.13,18.36 108.13,14.38 116.69,14.38 116.69,8.74 108.03,8.74
GND33
  Top 0.305: U34.6 112.69,35.65 C136.1 113.19,35.71 | 113.19,35.71 113.69,35.71 | 113.69,35.71 114.19,35.71 | 114.19,35.71 114.69,35.71 | 114.69,35.71 115.88,35.71 117.04,34.54 118.48,34.54 C133.2 C134.2 120.76,34.59 122.12,34.59 122.83,35.31 SV34.4 126.01,35.31 126.95,34.37 126.95,32.05 126.39,31.5 123.37,31.5 122.92,31.94 118.03,31.94 | U34.4 113.69,35.71 | U34.3 114.19,35.71 | U34.5 113.19,35.71 | U34.2 114.69,35.71 | U34.23 118.03,31.94 | U34.22 116.23,31.45 118.03,31.45 118.03,31.94
  pour Top: 108,25.76 127.03,25.76 127.03,37.92 108.1,37.92 108.1,33.93 116.66,33.93 116.66,28.3 108,28.3
GND34
  Top 0.305: U35.6 112.72,55.26 C140.1 113.22,55.32 | 113.22,55.32 113.72,55.32 | 113.72,55.32 114.22,55.32 | 114.22,55.32 114.72,55.32 | 114.72,55.32 115.9,55.32 117.07,54.15 118.5,54.15 C137.2 C138.2 120.79,54.2 122.15,54.2 122.86,54.91 SV35.4 126.04,54.91 126.97,53.98 126.97,51.66 126.42,51.1 123.39,51.1 122.95,51.55 118.06,51.55 | U35.4 113.72,55.32 | U35.3 114.22,55.32 | U35.5 113.22,55.32 | U35.2 114.72,55.32 | U35.23 118.06,51.55 | U35.22 116.25,51.05 118.06,51.05 118.06,51.55
  pour Top: 108.03,45.36 127.05,45.36 127.05,57.53 108.13,57.53 108.13,53.54 116.69,53.54 116.69,47.9 108.03,47.9
GND35
  Top 0.305: U36.6 112.69,74.82 C144.1 113.19,74.88 | 113.19,74.88 113.69,74.88 | 113.69,74.88 114.19,74.88 | 114.19,74.88 114.69,74.88 | 114.69,74.88 115.88,74.88 117.04,73.71 118.48,73.71 C141.2 C142.2 122.12,73.76 122.83,74.47 SV36.4 126.01,74.47 126.95,73.53 126.95,71.22 126.39,70.66 123.37,70.66 122.92,71.11 118.03,71.11 | U36.4 113.69,74.88 | U36.3 114.19,74.88 | U36.5 113.19,74.88 | U36.2 114.69,74.88 | U36.23 118.03,71.11 | U36.22 116.23,70.61 118.03,70.61 118.03,71.11
  pour Top: 108,64.92 127.03,64.92 127.03,77.09 108.1,77.09 108.1,73.1 116.66,73.1 116.66,67.46 108,67.46
GND36
  Top 0.305: U37.6 112.72,94.38 C148.1 113.22,94.44 | 113.22,94.44 113.72,94.44 | 113.72,94.44 114.22,94.44 | 114.22,94.44 114.72,94.44 | 114.72,94.44 115.9,94.44 117.07,93.27 118.5,93.27 C145.2 C146.2 120.79,93.32 122.15,93.32 122.86,94.03 SV37.4 126.04,94.03 126.97,93.09 126.97,90.78 126.42,90.22 123.39,90.22 122.95,90.67 118.06,90.67 | U37.4 113.72,94.44 | U37.3 114.22,94.44 | U37.5 113.22,94.44 | U37.2 114.72,94.44 | U37.23 118.06,90.67 | U37.22 116.25,90.17 118.06,90.17 118.06,90.67
  pour Top: 108.03,84.48 127.05,84.48 127.05,96.65 108.13,96.65 108.13,92.66 116.69,92.66 116.69,87.02 108.03,87.02
GND37
  Top 0.305: U38.6 112.69,113.93 C152.1 113.19,114 | 113.19,114 113.69,114 | 113.69,114 114.19,114 | 114.19,114 114.69,114 | 114.69,114 115.88,114 117.04,112.83 118.48,112.83 C149.2 C150.2 122.12,112.88 122.83,113.59 SV38.4 126.01,113.59 126.95,112.65 126.95,110.34 126.39,109.78 123.37,109.78 122.92,110.22 118.03,110.22 | U38.4 113.69,114 | U38.3 114.19,114 | U38.5 113.19,114 | U38.2 114.69,114 | U38.23 118.03,110.22 | U38.22 116.23,109.73 118.03,109.73 118.03,110.22
  pour Top: 108,104.04 127.03,104.04 127.03,116.2 108.1,116.2 108.1,112.22 116.66,112.22 116.66,106.58 108,106.58
GND40
  Top 0.305: U41.6 138.22,16.09 C164.1 138.72,16.15 | 138.72,16.15 139.22,16.15 | 139.22,16.15 139.72,16.15 | 139.72,16.15 140.22,16.15 | 140.22,16.15 141.4,16.15 142.57,14.99 144,14.99 C161.2 C162.2 146.29,15.04 147.65,15.04 148.36,15.75 SV41.4 151.54,15.75 152.48,14.81 152.48,12.5 151.92,11.94 148.9,11.94 148.45,12.38 143.56,12.38 | U41.4 139.22,16.15 | U41.3 139.72,16.15 | U41.5 138.72,16.15 | U41.2 140.22,16.15 | U41.23 143.56,12.38 | U41.22 141.75,11.89 143.56,11.89 143.56,12.38
  pour Top: 133.53,6.2 152.55,6.2 152.55,18.36 133.63,18.36 133.63,14.38 142.19,14.38 142.19,8.74 133.53,8.74
GND41
  Top 0.305: U42.6 138.2,35.65 C168.1 138.7,35.71 | 138.7,35.71 139.2,35.71 | 139.2,35.71 139.7,35.71 | 139.7,35.71 140.2,35.71 | 140.2,35.71 141.38,35.71 142.55,34.54 143.98,34.54 C165.2 C166.2 146.26,34.59 147.63,34.59 148.34,35.31 SV42.4 151.51,35.31 152.45,34.37 152.45,32.05 151.89,31.5 148.87,31.5 148.42,31.94 143.54,31.94 | U42.4 139.2,35.71 | U42.3 139.7,35.71 | U42.5 138.7,35.71 | U42.2 140.2,35.71 | U42.23 143.54,31.94 | U42.22 141.73,31.45 143.54,31.45 143.54,31.94
  pour Top: 133.5,25.76 152.53,25.76 152.53,37.92 133.6,37.92 133.6,33.93 142.16,33.93 142.16,28.3 133.5,28.3
GND42
  Top 0.305: U43.6 138.22,55.26 C172.1 138.72,55.32 | 138.72,55.32 139.22,55.32 | 139.22,55.32 139.72,55.32 | 139.72,55.32 140.22,55.32 | 140.22,55.32 141.4,55.32 142.57,54.15 144,54.15 C169.2 C170.2 146.29,54.2 147.65,54.2 148.36,54.91 SV43.4 151.54,54.91 152.48,53.98 152.48,51.66 151.92,51.1 148.9,51.1 148.45,51.55 143.56,51.55 | U43.4 139.22,55.32 | U43.3 139.72,55.32 | U43.5 138.72,55.32 | U43.2 140.22,55.32 | U43.23 143.56,51.55 | U43.22 141.75,51.05 143.56,51.05 143.56,51.55
  pour Top: 133.53,45.36 152.55,45.36 152.55,57.53 133.63,57.53 133.63,53.54 142.19,53.54 142.19,47.9 133.53,47.9
GND43
  Top 0.305: U44.6 138.2,74.82 C176.1 138.7,74.88 | 138.7,74.88 139.2,74.88 | 139.2,74.88 139.7,74.88 | 139.7,74.88 140.2,74.88 | 140.2,74.88 141.38,74.88 142.55,73.71 143.98,73.71 C173.2 C174.2 147.63,73.76 148.34,74.47 SV44.4 151.51,74.47 152.45,73.53 152.45,71.22 151.89,70.66 148.87,70.66 148.42,71.11 143.54,71.11 | U44.4 139.2,74.88 | U44.3 139.7,74.88 | U44.5 138.7,74.88 | U44.2 140.2,74.88 | U44.23 143.54,71.11 | U44.22 141.73,70.61 143.54,70.61 143.54,71.11
  pour Top: 133.5,64.92 152.53,64.92 152.53,77.09 133.6,77.09 133.6,73.1 142.16,73.1 142.16,67.46 133.5,67.46
GND44
  Top 0.305: U45.6 138.22,94.38 C180.1 138.72,94.44 | 138.72,94.44 139.22,94.44 | 139.22,94.44 139.72,94.44 | 139.72,94.44 140.22,94.44 | 140.22,94.44 141.4,94.44 142.57,93.27 144,93.27 C177.2 C178.2 146.29,93.32 147.65,93.32 148.36,94.03 SV45.4 151.54,94.03 152.48,93.09 152.48,90.78 151.92,90.22 148.9,90.22 148.45,90.67 143.56,90.67 | U45.4 139.22,94.44 | U45.3 139.72,94.44 | U45.5 138.72,94.44 | U45.2 140.22,94.44 | U45.23 143.56,90.67 | U45.22 141.75,90.17 143.56,90.17 143.56,90.67
  pour Top: 133.53,84.48 152.55,84.48 152.55,96.65 133.63,96.65 133.63,92.66 142.19,92.66 142.19,87.02 133.53,87.02
GND45
  Top 0.305: U46.6 138.2,113.93 C184.1 138.7,114 | 138.7,114 139.2,114 | 139.2,114 139.7,114 | 139.7,114 140.2,114 | 140.2,114 141.38,114 142.55,112.83 143.98,112.83 C181.2 C182.2 147.63,112.88 148.34,113.59 SV46.4 151.51,113.59 152.45,112.65 152.45,110.34 151.89,109.78 148.87,109.78 148.42,110.22 143.54,110.22 | U46.4 139.2,114 | U46.3 139.7,114 | U46.5 138.7,114 | U46.2 140.2,114 | U46.23 143.54,110.22 | U46.22 141.73,109.73 143.54,109.73 143.54,110.22
  pour Top: 133.5,104.04 152.53,104.04 152.53,116.2 133.6,116.2 133.6,112.22 142.16,112.22 142.16,106.58 133.5,106.58
N$1
  Top 0.305: C8.2 arc-90 8.92,35.25 8.92,32.46 arc90 8.94,32.44 U2.7
N$2
  Top 0.305: U2.8 7.34,31.94 C7.2
N$3
  Top 0.305: U2.9 8.78,31.44 8.33,30.99 8.33,30.48 8.08,30.23 8.08,30.22 C7.1
N$4
  Top 0.305: R3.1 16.08,29.82 15.98,29.95 13.81,29.95 U2.19
N$5
  Top 0.305: U2.20 17.59,30.44 18.34,29.69 R4.1
N$6
  Top 0.305: C12.2 arc-90 8.94,54.85 8.94,52.07 arc90 8.96,52.05 U3.7
N$7
  Top 0.305: U3.8 7.36,51.55 C11.2
N$8
  Top 0.305: U3.9 8.81,51.05 8.36,50.6 8.36,50.09 8.1,49.83 8.1,49.82 C11.1
N$9
  Top 0.305: R5.1 16.1,49.43 16,49.56 13.83,49.56 U3.19
N$10
  Top 0.305: U3.20 17.62,50.05 18.36,49.3 R6.1
N$11
  Top 0.305: C16.2 arc-90 8.92,74.41 8.92,71.63 arc90 8.94,71.61 U4.7
N$12
  Top 0.305: U4.8 7.34,71.11 C15.2
N$13
  Top 0.305: U4.9 8.78,70.61 8.33,70.15 8.33,69.65 8.08,69.39 8.08,69.38 C15.1
N$14
  Top 0.305: R7.1 16.08,68.99 15.98,69.11 13.81,69.11 U4.19
N$15
  Top 0.305: U4.20 17.59,69.61 18.34,68.86 R8.1
N$16
  Top 0.305: C20.2 arc-90 8.94,93.97 8.94,91.19 arc90 8.96,91.17 U5.7
N$17
  Top 0.305: U5.8 7.36,90.67 C19.2
N$18
  Top 0.305: U5.9 8.81,90.17 8.36,89.71 8.36,89.2 8.1,88.95 8.1,88.94 C19.1
N$19
  Top 0.305: R9.1 16.1,88.54 16,88.67 13.83,88.67 U5.19
N$20
  Top 0.305: C2.2 arc-90 8.94,15.69 8.94,12.9 arc90 8.96,12.88 U1.7
N$21
  Top 0.305: U1.8 7.36,12.38 C1.2
N$22
  Top 0.305: U1.9 8.81,11.88 8.36,11.43 8.36,10.92 8.1,10.67 8.1,10.66 C1.1
N$23
  Top 0.305: R1.1 16.1,10.26 16,10.39 13.83,10.39 U1.19
N$24
  Top 0.305: U1.20 17.62,10.88 18.36,10.13 R2.1
N$25
  Top 0.305: U5.20 17.62,89.17 18.36,88.42 R10.1
N$26
  Top 0.305: C24.2 arc-90 8.92,113.53 8.92,110.74 arc90 8.94,110.72 U6.7
N$27
  Top 0.305: U6.8 7.34,110.22 C23.2
N$28
  Top 0.305: U6.9 8.78,109.72 8.33,109.27 8.33,108.76 8.08,108.51 8.08,108.5 C23.1
N$29
  Top 0.305: R11.1 16.08,108.1 15.98,108.23 13.81,108.23 U6.19
N$30
  Top 0.305: U6.20 17.59,108.72 18.34,107.98 R12.1
N$41
  Top 0.305: C36.2 arc-90 34.44,15.69 34.44,12.9 arc90 34.46,12.88 U9.7
N$42
  Top 0.305: U9.8 32.86,12.38 C35.2
N$43
  Top 0.305: U9.9 34.31,11.88 33.86,11.43 33.86,10.92 33.6,10.67 33.6,10.66 C35.1
N$44
  Top 0.305: R17.1 41.61,10.26 41.5,10.39 39.33,10.39 U9.19
N$45
  Top 0.305: U9.20 43.12,10.88 43.87,10.13 R18.1
N$46
  Top 0.305: C40.2 arc-90 34.42,35.25 34.42,32.46 arc90 34.44,32.44 U10.7
N$47
  Top 0.305: U10.8 32.84,31.94 C39.2
N$48
  Top 0.305: U10.9 34.29,31.44 33.83,30.99 33.83,30.48 33.58,30.23 33.58,30.22 C39.1
N$49
  Top 0.305: R19.1 41.58,29.82 41.48,29.95 39.31,29.95 U10.19
N$50
  Top 0.305: U10.20 43.09,30.44 43.84,29.69 R20.1
N$51
  Top 0.305: C44.2 arc-90 34.44,54.85 34.44,52.07 arc90 34.46,52.05 U11.7
N$52
  Top 0.305: U11.8 32.86,51.55 C43.2
N$53
  Top 0.305: U11.9 34.31,51.05 33.86,50.6 33.86,50.09 33.6,49.83 33.6,49.82 C43.1
N$54
  Top 0.305: R21.1 41.61,49.43 41.5,49.56 39.33,49.56 U11.19
N$55
  Top 0.305: U11.20 43.12,50.05 43.87,49.3 R22.1
N$56
  Top 0.305: C48.2 arc-90 34.42,74.41 34.42,71.63 arc90 34.44,71.61 U12.7
N$57
  Top 0.305: U12.8 32.84,71.11 C47.2
N$58
  Top 0.305: U12.9 34.29,70.61 33.83,70.15 33.83,69.65 33.58,69.39 33.58,69.38 C47.1
N$59
  Top 0.305: R23.1 41.58,68.99 41.48,69.11 39.31,69.11 U12.19
N$60
  Top 0.305: U12.20 43.09,69.61 43.84,68.86 R24.1
N$61
  Top 0.305: C52.2 arc-90 34.44,93.97 34.44,91.19 arc90 34.46,91.17 U13.7
N$62
  Top 0.305: U13.8 32.86,90.67 C51.2
N$63
  Top 0.305: U13.9 34.31,90.17 33.86,89.71 33.86,89.2 33.6,88.95 33.6,88.94 C51.1
N$64
  Top 0.305: R25.1 41.61,88.54 41.5,88.67 39.33,88.67 U13.19
N$65
  Top 0.305: U13.20 43.12,89.17 43.87,88.42 R26.1
N$66
  Top 0.305: C56.2 arc-90 34.42,113.53 34.42,110.74 arc90 34.44,110.72 U14.7
N$67
  Top 0.305: U14.8 32.84,110.22 C55.2
N$68
  Top 0.305: U14.9 34.29,109.72 33.83,109.27 33.83,108.76 33.58,108.51 33.58,108.5 C55.1
N$69
  Top 0.305: R27.1 41.58,108.1 41.48,108.23 39.31,108.23 U14.19
N$70
  Top 0.305: U14.20 43.09,108.72 43.84,107.98 R28.1
N$81
  Top 0.305: C68.2 arc-90 60.15,15.69 60.15,12.9 arc90 60.17,12.88 U17.7
N$82
  Top 0.305: U17.8 58.57,12.38 C67.2
N$83
  Top 0.305: U17.9 60.02,11.88 59.56,11.43 59.56,10.92 59.31,10.67 59.31,10.66 C67.1
N$84
  Top 0.305: R33.1 67.31,10.26 67.21,10.39 65.04,10.39 U17.19
N$85
  Top 0.305: U17.20 68.82,10.88 69.57,10.13 R34.1
N$86
  Top 0.305: C72.2 arc-90 60.12,35.25 60.12,32.46 arc90 60.14,32.44 U18.7
N$87
  Top 0.305: U18.8 58.54,31.94 C71.2
N$88
  Top 0.305: U18.9 59.99,31.44 59.54,30.99 59.54,30.48 59.28,30.23 59.28,30.22 C71.1
N$89
  Top 0.305: R35.1 67.28,29.82 67.18,29.95 65.01,29.95 U18.19
N$90
  Top 0.305: U18.20 68.8,30.44 69.55,29.69 R36.1
N$91
  Top 0.305: C76.2 arc-90 60.15,54.85 60.15,52.07 arc90 60.17,52.05 U19.7
N$92
  Top 0.305: U19.8 58.57,51.55 C75.2
N$93
  Top 0.305: U19.9 60.02,51.05 59.56,50.6 59.56,50.09 59.31,49.83 59.31,49.82 C75.1
N$94
  Top 0.305: R37.1 67.31,49.43 67.21,49.56 65.04,49.56 U19.19
N$95
  Top 0.305: U19.20 68.82,50.05 69.57,49.3 R38.1
N$96
  Top 0.305: C80.2 arc-90 60.12,74.41 60.12,71.63 arc90 60.14,71.61 U20.7
N$97
  Top 0.305: U20.8 58.54,71.11 C79.2
N$98